# EAGLE board DSLR_controller (EAGLE 7.0.0)
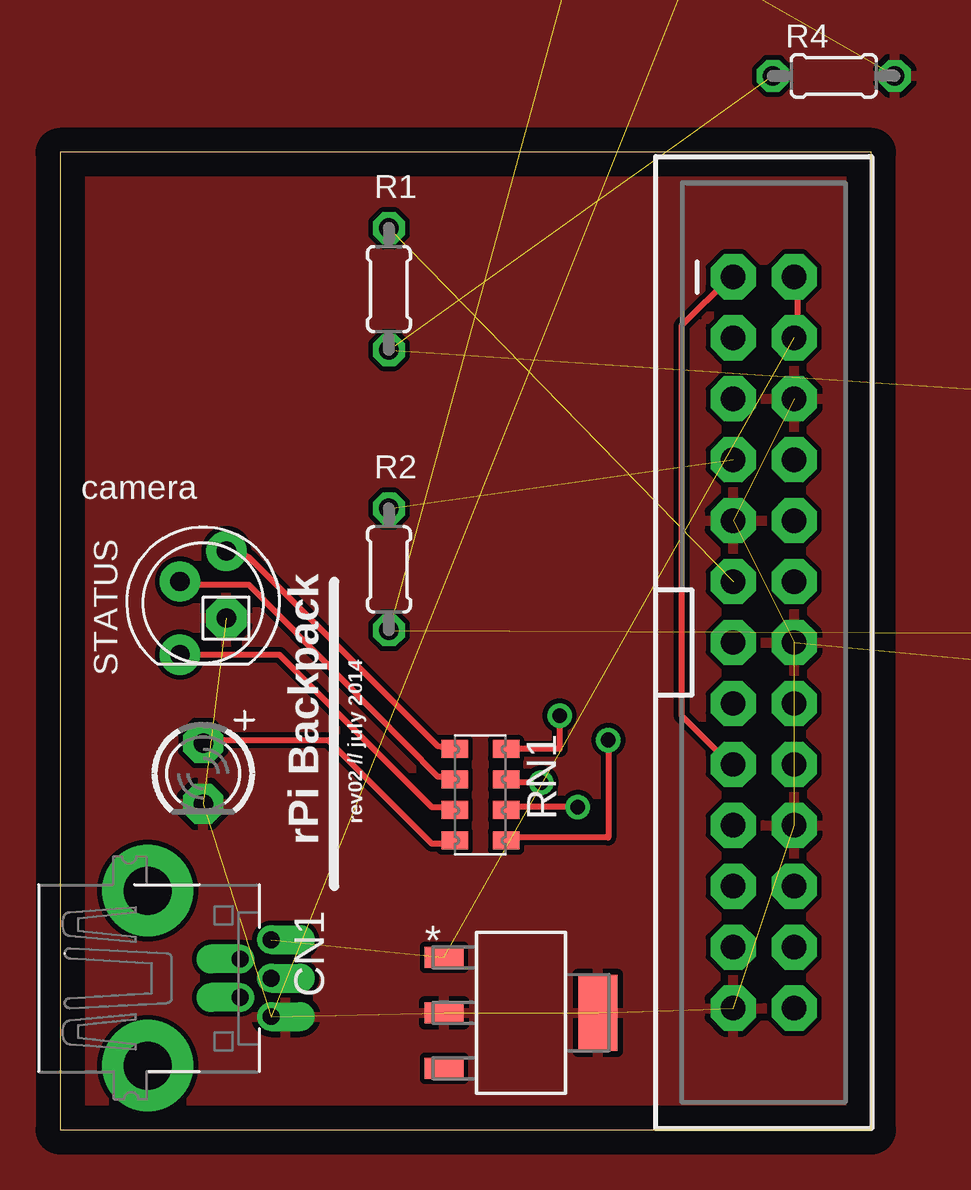
[diagram p0: board, top side]
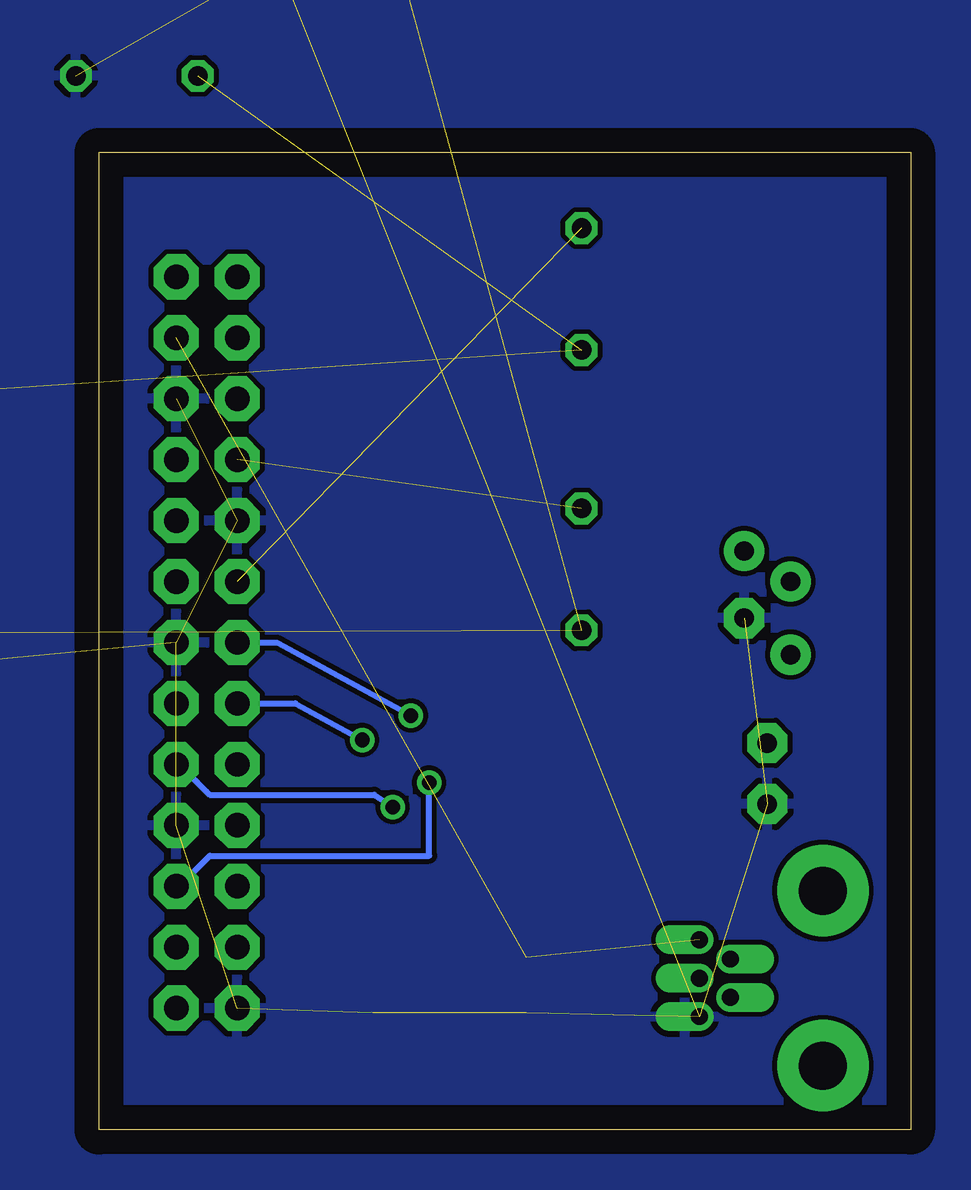
[diagram p1: board, bottom side, seen from below]

Size 33.83 x 40.76 mm. Coordinates in mm from the lower left corner, seen from the top.
Outline: 0,0 33.83,0 33.83,40.76 0,40.76 0,0
Copper layers (1*16): Top 0.035mm / dielectric 1.5mm / Bottom 0.035mm
Design rules "default": minimum track width 10mil, minimum drill 24mil, track to track 8mil, track to pad 8mil, pad to pad 8mil, via to via 8mil, smd to smd 8mil, copper to edge 40mil, drill to drill 8mil, minimum pad ring 10mil, minimum via ring 8mil, stop-mask expansion 4mil, vias tented up to drill 0mil, thermal gap 10mil
Net classes: 1 VCC: width 0.381 mm
Holes 2.54 mm at 83.1,23.89 78.96,13.3

## Footprints (pad centres in the part's own frame; a part is rotated, then mirrored left to right if it is on the bottom)
USB-MINIB-THM-MOLEX = drill 0.7 offset: D+ 0,9.72; D- -0.8,8.42; GND 1.6,9.72; ID 0.8,8.42; VBUS -1.6,9.72 | drill 2 pad 3.81: GND1 -3.65,4.57; GND4 3.65,4.57
2X13-SHROUDED = drill 1.016 pad 1.88 octagon: 1 -1.27,15.24; 2 1.27,15.24; 3 -1.27,12.7; 4 1.27,12.7; 5 -1.27,10.16; 6 1.27,10.16; 7 -1.27,7.62; 8 1.27,7.62; 9 -1.27,5.08; 10 1.27,5.08; 11 -1.27,2.54; 12 1.27,2.54; 13 -1.27,0; 14 1.27,0; 15 -1.27,-2.54; 16 1.27,-2.54; 17 -1.27,-5.08; 18 1.27,-5.08; 19 -1.27,-7.62; 20 1.27,-7.62; 21 -1.27,-10.16; 22 1.27,-10.16; 23 -1.27,-12.7; 24 1.27,-12.7; 25 -1.27,-15.24; 26 1.27,-15.24
LED3MM = drill 0.813 pad 1.676 octagon: A -1.27,0; K 1.27,0
0204/5 = drill 0.813 octagon: 1 -2.54,0; 2 2.54,0
EXBS8V = smd 0.75 x 1.1: 1 -1.905,-1.07; 2 -0.635,-1.07; 3 0.635,-1.07; 4 1.905,-1.07; 5 1.905,1.07; 6 0.635,1.07; 7 -0.635,1.07; 8 -1.905,1.07
LED5MMRGB = drill 0.8 pad 1.676: 1 -2.159,0.968; 3 0.889,0.968; 4 2.159,-0.968 | drill 0.8 pad 1.676 octagon: 2 -0.635,-0.968
SOT230P700X180-4N = smd 1.626 x 0.889: 1 -3.2,2.311; 2 -3.2,0; 3 -3.2,-2.311 | smd 1.626 x 3.175: 4 3.2,0
4-JACK-SMD = smd 2.108 x 2.108: 1 2.362,-1.143; 2 4.216,7.137; 3 11.354,-1.143; 4 1.6,7.137; 5 15.672,3.962 | hole 1.651: 3.505,2.997; 10.516,2.997
4-OPTORELAY = smd 1.3 x 0.559: 1 -0.66,3.378; 2 -0.66,0.838; 3 4.928,0.838; 4 4.928,3.378

## Placement (x,y rotation side)
CN1  [USB-MINIB-THM-MOLEX]  -0.92,6.33 270 top
JP1  RASPBERRYPI-GPIOPTH  [2X13-SHROUDED]  29.34,20.32 0 top
LED1  [LED3MM]  5.97,14.86 270 top
R1  105  [0204/5]  13.72,35.05 270 top
R2  105  [0204/5]  13.72,23.37 270 top
R3  60  [0204/5]  23.88,48.77 0 top  (outside the outline)
R4  60  [0204/5]  32.26,43.94 0 top  (outside the outline)
RN1  [EXBS8V]  17.53,13.97 270 top
STATUS  RGBLED_CA-5MM  [LED5MMRGB]  5.97,21.97 90 top
U1  MCP1703-3302E/DB  [SOT230P700X180-4N]  19.22,4.88 0 top
U$1  SWTCHCRFT_3.5JACK5-JACK-SMD  [4-JACK-SMD]  42.93,39.37 0 top  (outside the outline)
U$2  CPC1025_OPTORELAY  [4-OPTORELAY]  54.86,26.42 0 top  (outside the outline)
U$3  CPC1025_OPTORELAY  [4-OPTORELAY]  54.61,17.27 0 top  (outside the outline)

## Library data of the parts
CN1 LED1 STATUS = adafruit
JP1 = SparkFun-Boards; DIST: sparkfun; DIST_ID: PRT-11490
R1-R4 = resistor
RN1 = resistor-dil; OC_FARNELL: unknown; OC_NEWARK: unknown
U1 = Microchip_By_element14_Batch_1; MPN: MCP1703-3302E/DB; OC_FARNELL: 1627177; OC_NEWARK: 40M0623; PACKAGE: SOT-223-3; SUPPLIER: Microchip
U$1-U$3 = jmsaavedra

## Nets
3.3V: JP1.1 JP1.17
5VRAW: CN1.VBUS JP1.2 JP1.4 U1.1
CACTUS_3V3: U1.3
CACTUS_TRIP: JP1.16
CAM_AF: JP1.11 R1.1
CAM_RING: U$1.2 U$2.3
CAM_SHUTTER: JP1.7 R2.1
CAM_SLEEVE: U$1.1 U$2.4 U$3.4
CAM_TIP: U$1.3 U$3.3
GND: CN1.GND JP1.6 JP1.9 JP1.14 JP1.20 JP1.25 LED1.K R3.2 R4.2 STATUS.2 U1.2 U1.4 U$2.2 U$3.2
LED_BLUE: JP1.13 RN1.8
LED_GRN: JP1.22 RN1.7
LED_RED: JP1.18 RN1.6
N$1: RN1.1 STATUS.4
N$2: RN1.2 STATUS.3
N$3: RN1.3 STATUS.1
N$4: JP1.15 RN1.5
N$5: LED1.A RN1.4
N$6: R1.2 R4.1 U$2.1
N$7: R2.2 R3.1 U$3.1

## Tracks (layer width: path | path; a pad name or v marks a point on that pad's centre or on a via)
3.3V
  Top 0.254: JP1.17 27.94,15.24 25.91,17.27 25.91,33.53 27.94,35.56 JP1.1
5VRAW  (2 unrouted)
  Top 0.254: JP1.4 30.73,33.02 30.73,35.56 JP1.2
CAM_AF  (1 unrouted)
CAM_RING  (1 unrouted)
CAM_SHUTTER  (1 unrouted)
CAM_SLEEVE  (2 unrouted)
CAM_TIP  (1 unrouted)
GND  (13 unrouted)
  pour Bottom: -8.89,62.23 111.76,62.23 111.76,-3.81 -7.37,-3.56
  pour Top: -6.35,57.15 113.03,57.15 113.03,-5.08 -6.35,-5.08
LED_BLUE  (via drill 0.61)
  Top 0.254: v20.83,17.27 20.83,15.87 RN1.8
  Bottom 0.254: v20.83,17.27 26.42,20.32 JP1.13
LED_GRN  (via drill 0.61)
  Top 0.254: v20.07,14.48 18.8,14.48 RN1.7
  Bottom 0.254: v20.07,14.48 20.07,11.43 29.21,11.43 30.48,10.16 JP1.22
LED_RED  (via drill 0.61)
  Top 0.254: v21.59,13.46 18.8,13.46 RN1.6
  Bottom 0.254: v21.59,13.46 22.35,13.97 29.21,13.97 30.48,15.24 JP1.18
N$1
  Top 0.254: RN1.1 15.75,16 7.87,23.88 7.11,24.38 7.11,24.13 STATUS.4
N$2
  Top 0.254: RN1.2 16.26,14.73 15.75,14.73 7.87,22.73 5.08,22.73 5.08,22.86 STATUS.3
N$3
  Top 0.254: STATUS.1 9.14,19.81 15.49,13.46 16.26,13.46 RN1.3
N$4  (via drill 0.61)
  Top 0.254: v22.86,16.26 22.86,12.19 18.8,12.19 RN1.5
  Bottom 0.254: v22.86,16.26 25.65,17.78 JP1.15
N$5
  Top 0.254: RN1.4 16.26,11.94 15.49,11.94 11.18,16.26 6.1,16.26 LED1.A
N$6  (2 unrouted)
N$7  (2 unrouted)

## Text on the board
tPlace: autofocus | shutter | camera | rPi Backpack | rev02 // july 2014 | pi